# Altium PCB DT.PcbDoc
Units mil, origin at the board's own origin, x right, y up, seen from the top; angles counter-clockwise.
Board outline 3270 x 4330 mil, 2 copper layers (Top Layer, Bottom Layer); 105 components, 51 nets, 283 pads, 61 vias.
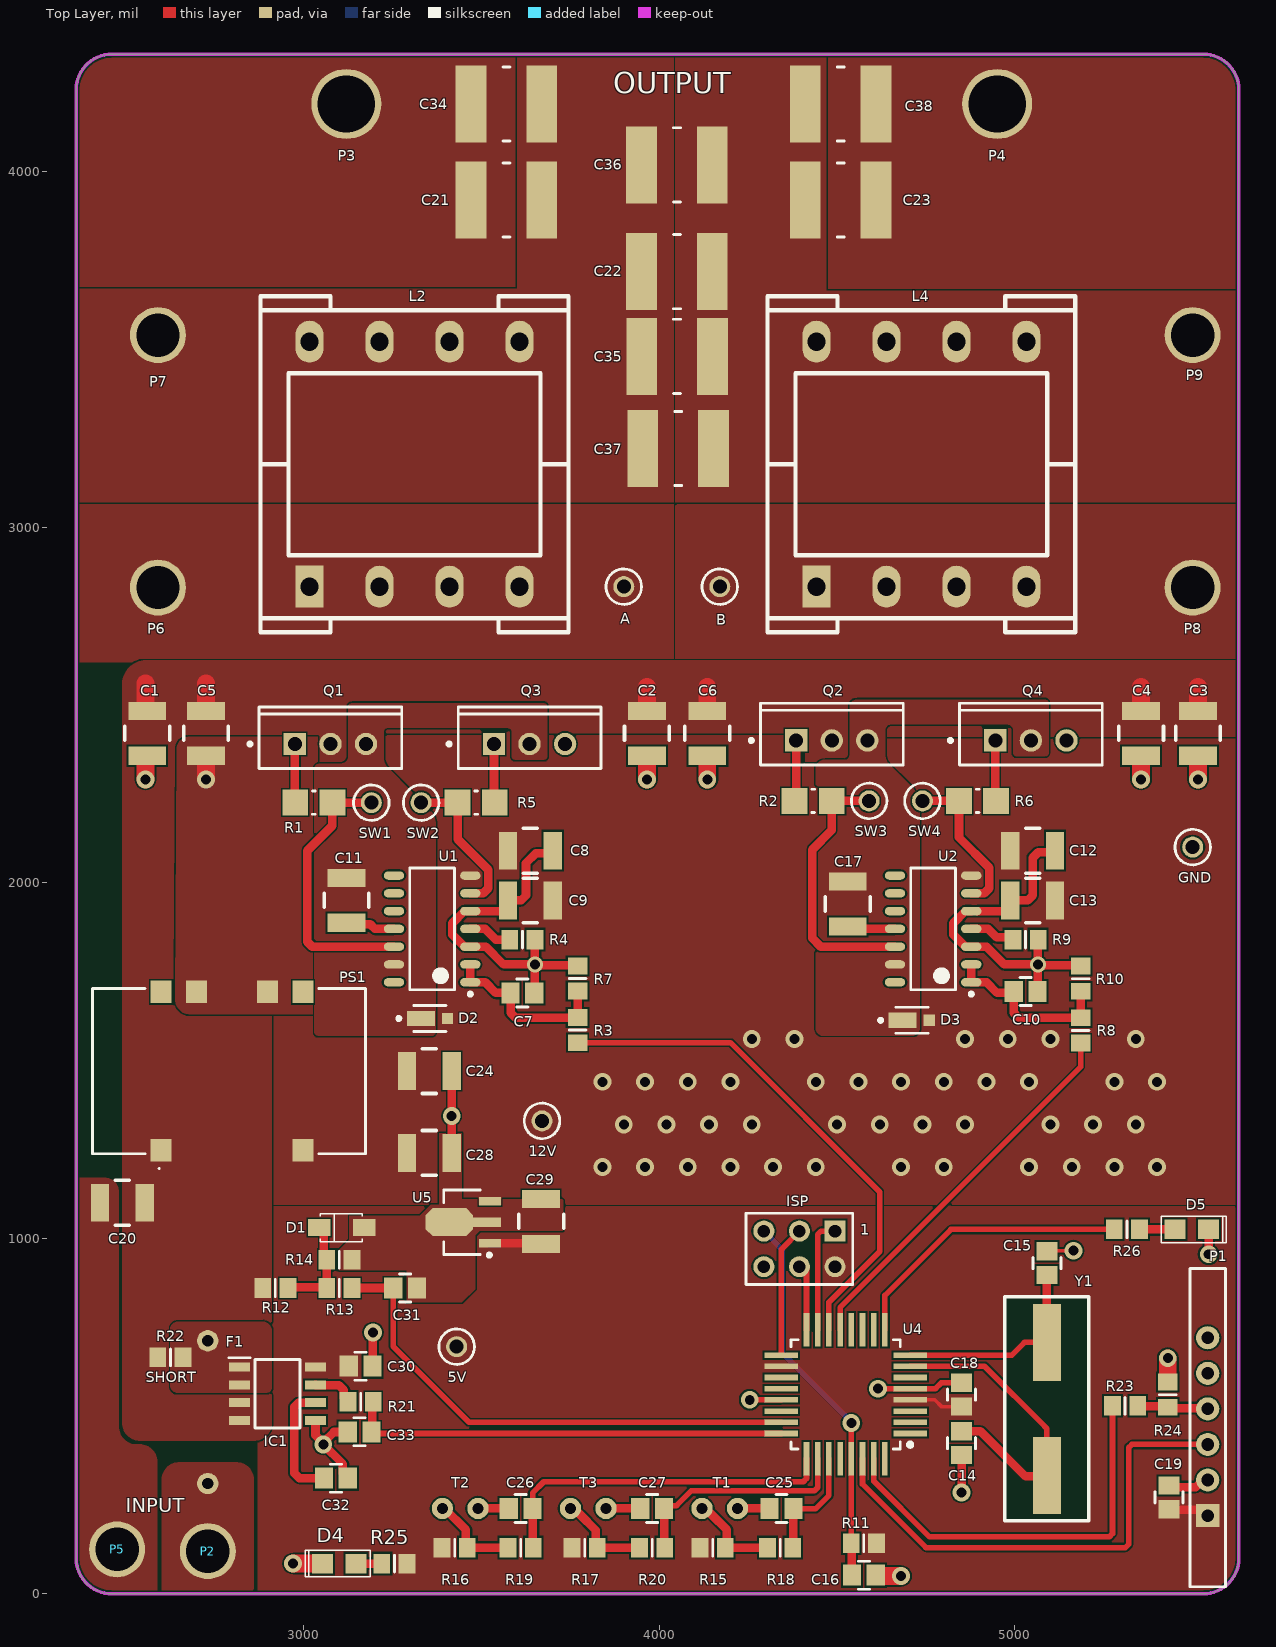
[diagram p0: Top Layer view]
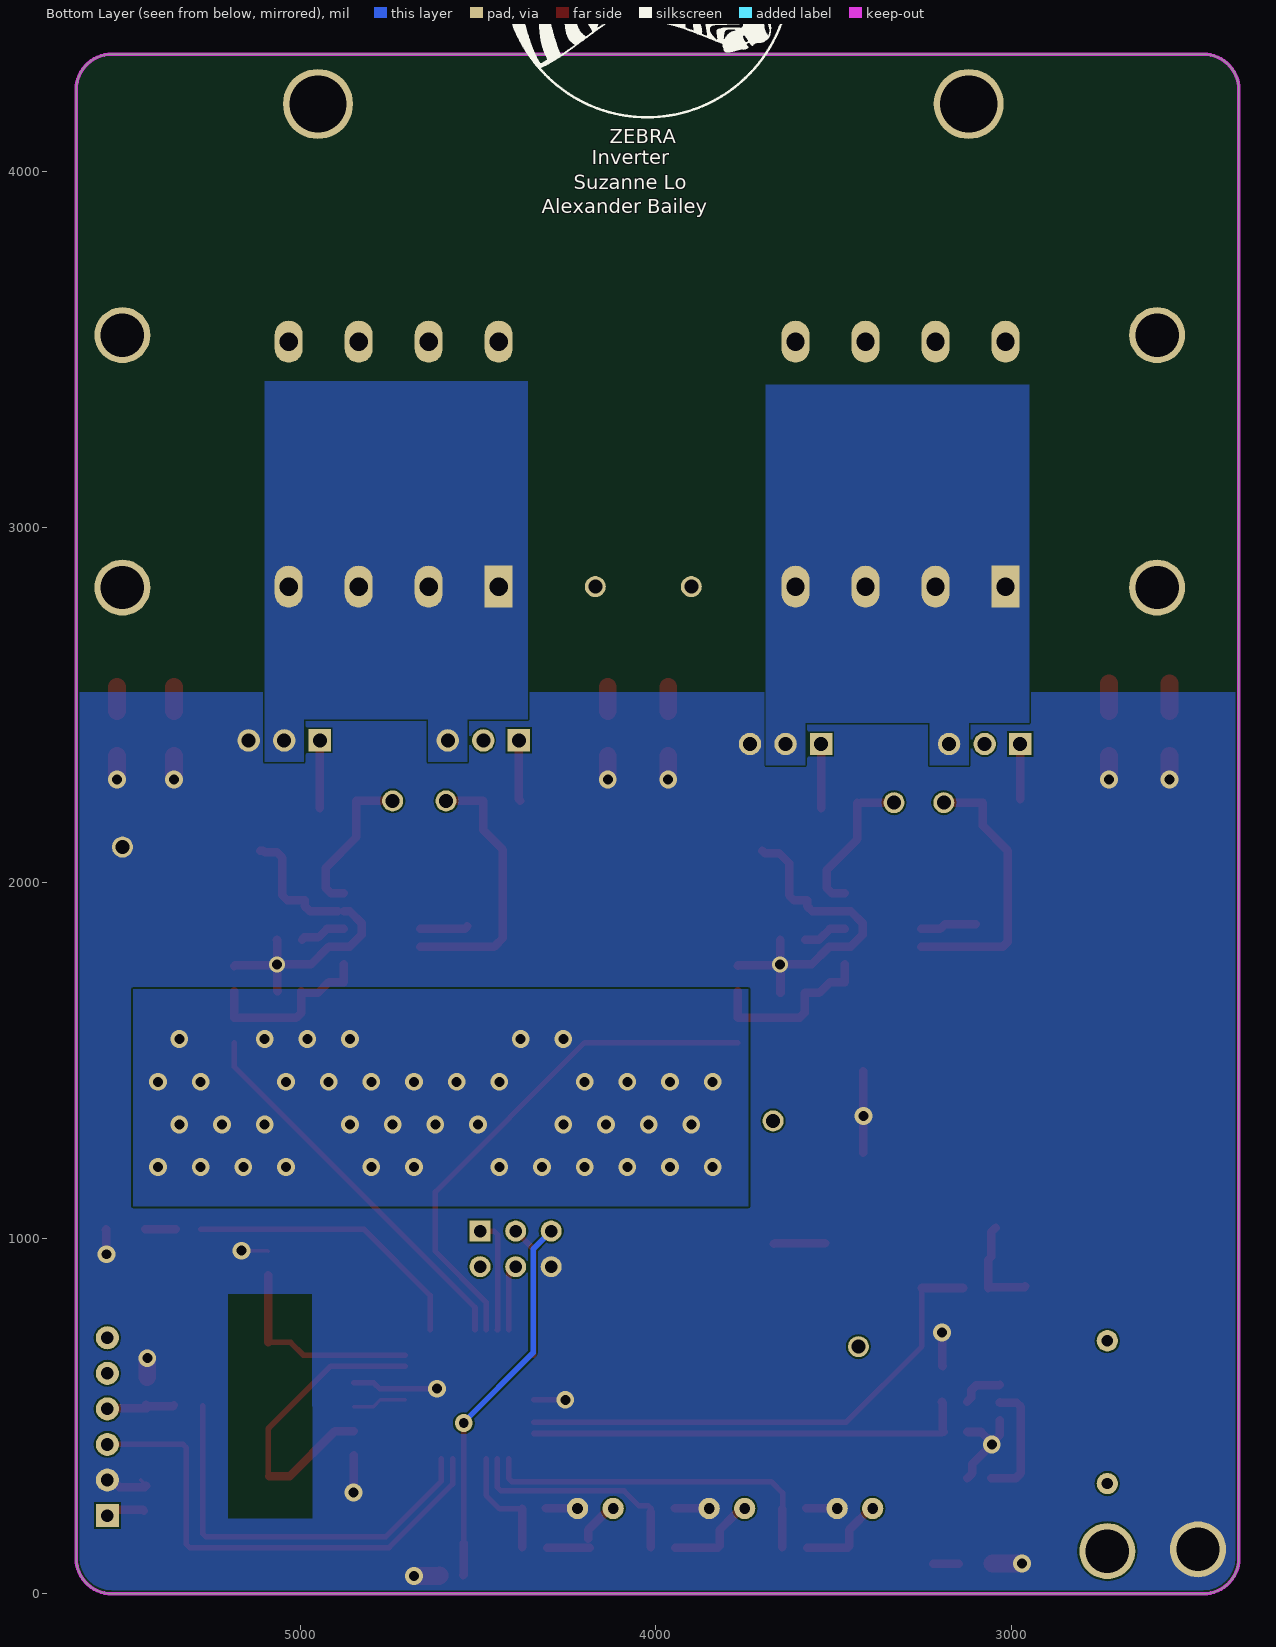
[diagram p1: Bottom Layer view, seen from below]
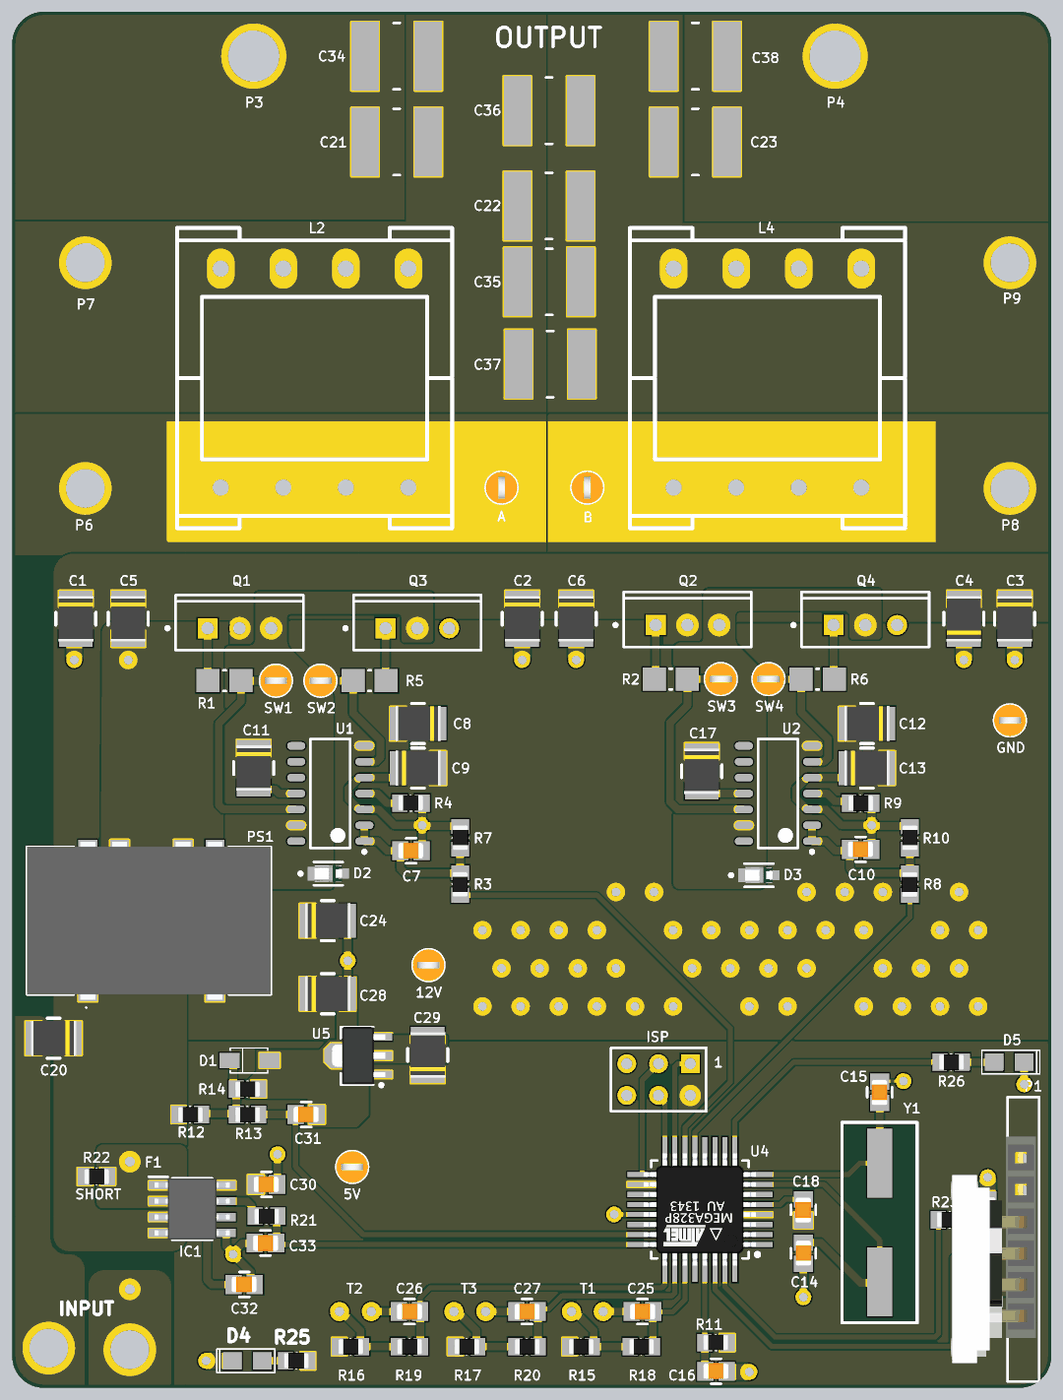
[diagram p2: 3D render of the assembled board from above, using the file's embedded part models]

## Layer stack, top to bottom
Top Solder: solder mask 0.4, Solder Resist, Dk 3.5
Top Layer: signal copper 1.4
Dielectric 1: dielectric 12.6, FR-4, Dk 4.8
Bottom Layer: signal copper 1.4
Bottom Solder: solder mask 0.4, Solder Resist, Dk 3.5

## Board outline
2360,100 ccw(c2460,100) 2460,0 5530,0 ccw(c5530,100) 5630,100 5630,4230 ccw(c5530,4230) 5530,4330 2460,4330 ccw(c2460,4230) 2360,4230

## Design rules (kind name [scope] priority, off if disabled: settings)
Clearance [All] p1: gap=5 ignorepadtopadclearanceinfootprint=FALSE
Height [All] p1: minheight=0 maxheight=5000 prefheight=500
HoleSize [All] p1: absolutevalues=TRUE maxlimit=165 minlimit=1 maxpercent=80.000 minpercent=20.000
MinimumSolderMaskSliver [All] p1: minsoldermaskwidth=5
PolygonConnect [All] p1: connectstyle=Direct reliefconductorwidth=10 reliefentries=4 polygonreliefangle="90 Angle" airgapwidth=0
RoutingVias [All] p1: holewidth=28 width=50 viastyle="Through Hole" minholewidth=28 minwidth=40 maxholewidth=28 maxwidth=50
SilkToSolderMaskClearance [All] p1: minsilkscreentomaskgap=1.5 clearancetoexposedcopper=TRUE
SolderMaskExpansion [All] p1: expansion=4 istentingtop=FALSE
Width "uC Route" [InComponent('U4')] p1: maxlimit=16 minlimit=16 preferedwidth=16 minimp=50.000000 maximp=50.000000 favimp=50.000000
Width [All] p2: maxlimit=50 minlimit=10 preferedwidth=24 minimp=50.000000 maximp=50.000000 favimp=50.000000
26 further rules are at their usual default settings.

## Classes and differential pairs
component class Misc: 5V 12V A B C20 C24 C25 C26 C27 C28 C29 C30 C31 C32 C33 D1 F1 IC1 P2 P3 P4 P5 PS1 R12 R13 R14 R15 R16 R17 R18 R19 R20 R21 R22 sw1 sw2 SW3 SW4 T1 T2 T3 U5
component class Control: C14 C15 C16 C18 C19 D4 D5 ISP P1 R11 R23 R24 R25 R26 U4 Y1
component class Bridge: C1 C2 C3 C4 C5 C6 C7 C8 C9 C10 C11 C12 C13 C17 C21 C22 C23 C34 C35 C36 C37 C38 D2 D3 L2 L4 P6 P7 P8 P9 Q1 Q2 Q3 Q4 R1 R2 R3 R4 R5 R6 R7 R8 R9 R10 U1 U2

## Components (designator, comment, footprint, x,y, rotation, side; value= is the part's Value field where it differs from the comment)
5V "5003" TP_TH 3430,695 r0 top (schematic designator TP5)
12V "5003" TP_TH 3670,1330 r0 top (schematic designator TP3)
A "5003" TP_TH 3900,2832.51 r90 top (schematic designator TP10)
B "5003" TP_TH 4170,2832.51 r90 top (schematic designator TP11)
C1 "" C1210 2560,2420 r270 top
C2 "" C1210 3965,2420 r270 top
C3 "" C1210 5515,2420 r270 top
C4 "" C1210 5355,2420 r90 top
C5 "" C1210 2725,2420 r270 top
C6 "" C1210 4135,2420 r270 top
C7 "" C0805 3615,1690 r0 top
C8 "" C1210 3637.01,2090 r180 top
C9 "" C1210 3637.01,1950 r0 top
C10 "" C0805 5030,1694.09 r0 top
C11 "10u" C1210 3120,1950 r270 top
C12 "" C1210 5050,2090 r180 top
C13 "" C1210 5050,1950 r0 top
C14 "" C0805 4850,423.46 r270 top
C15 "" C0805 5090,930 r90 top
C16 "" C0805 4575,52.18 r0 top
C17 "10u" C1210 4530,1940 r270 top
C18 "" C0805 4850,560 r90 top
C19 "" C0805 5433,271 r90 top
C20 "10u" C1210 2490,1100 r180 top
C21 "" C5750 3570,3920 r180 top
C22 "" C5750 4049.51,3718.59 r180 top
C23 "" C5750 4510,3920 r0 top
C24 "10u" C1210 3352.99,1470 r0 top
C25 "" C0805 4343.46,240 r180 top
C26 "" C0805 3610,240 r180 top
C27 "" C0805 3980,240 r180 top
C28 "10u" C1210 3352.99,1240 r0 top
C29 "10u" C1210 3667.6,1047.17 r90 top
C30 "" C0805 3160,640 r0 top
C31 "" C0805 3285,860 r0 top
C32 "" C0805 3090.2,325 r0 top
C33 "" C0805 3157.13,455.47 r180 top
C34 "" C5750 3570,4190 r180 top
C35 "" C5750 4050,3480 r180 top
C36 "" C5750 4049.51,4018.59 r180 top
C37 "" C5750 4053,3221 r180 top
C38 "" C5750 4510,4190 r0 top
D1 "BZT52H-B5V1" SOD123 3105,1030 r180 top
D2 "MSS1P6-M3/89A" FP-96591-MFG 3354.8,1618 r0 top value=40pF
D3 "MSS1P6-M3/89A" FP-96591-MFG 4710,1613 r0 top value=40pF
D4 "LTST-C170KGKT" "0805 LED" 3100,85 r180 top
D5 "LTST-C170KGKT" "0805 LED" 5497.76,1025 r0 top
F1 "MF-RX250/72-0" TH_FUSE 2730,310 r90 top
GND "5003" TP_TH 5500,2100 r0 top (schematic designator TP2)
IC1 "ACS730KLCTR-20AB-T" SOIC127P600X175-8N 2926.2,562.5 r0 top
ISP "P2" HDR2X3 4494.02,1020 r180 top
L2 "" EFD20 3311.57,3177 r90 top
L4 "" EFD20 4737,3177 r90 top
P1 "BLE Module Header" HM10_HDR1X6 5542.24,220 r90 top
P2 "Lug" "M3 Lug" 2730,120 r0 top
P3 "Lug" "M4 Lug" 3120,4190 r0 top
P4 "Lug" "M4 Lug" 4950,4190 r0 top
P5 "Lug" "M3 Lug" 2475,125 r0 top
P6 "Lug" "M3 Lug" 2590,2830 r0 top
P7 "Lug" "M3 Lug" 2590,3540 r0 top
P8 "Lug" "M3 Lug" 5500,2830 r0 top
P9 "Lug" "M3 Lug" 5500,3540 r0 top
PS1 "STH0548S12" STH0548S12 2790,1470 r0 top
Q1 "IPP80N04S4-04" INF-PG-TO220-3-1 3075,2390 r90 top
Q2 "IPP80N04S4-04" INF-PG-TO220-3-1 4485,2400 r90 top
Q3 "IPP80N04S4-04" INF-PG-TO220-3-1 3635,2390 r90 top
Q4 "IPP80N04S4-04" INF-PG-TO220-3-1 5045,2400 r90 top
R1 "" R1206 3028.17,2225 r180 top
R2 "" R1206 4432.83,2230 r180 top
R3 "" R0805 3770,1585.43 r90 top
R4 "" R0805 3615,1840 r0 top
R5 "" R1206 3485,2225 r180 top
R6 "" R1206 4895,2230 r180 top
R7 "" R0805 3770,1730.43 r270 top
R8 "" R0805 5185,1584.57 r90 top
R9 "" R0805 5030,1840 r180 top
R10 "" R0805 5185,1730 r270 top
R11 "" R0805 4575,142.18 r0 top
R12 "" R0805 2920,860 r180 top
R13 "" R0805 3100,860 r180 top
R14 "" R0805 3100,940 r180 top
R15 "" R0805 4150,130 r180 top
R16 "" R0805 3424.57,130 r180 top
R17 "" R0805 3790,130 r180 top
R18 "" R0805 4340,130 r180 top
R19 "" R0805 3610,130 r180 top
R20 "" R0805 3980,130 r180 top
R21 "" R0805 3160,540 r180 top
R22 "0R" R0805 2625,665 r180 top
R23 "" R0805 5310,528.5 r0 top
R24 "" R0805 5430,560 r270 top
R25 "" R0805 3255,85 r0 top
R26 "" R0805 5315,1025 r180 top
SW1 "5003" TP_TH 3190,2225 r0 top (schematic designator TP6)
SW2 "5003" TP_TH 3330,2225 r0 top (schematic designator TP7)
SW3 "5003" TP_TH 4590,2230 r0 top (schematic designator TP8)
SW4 "5003" TP_TH 4740,2230 r0 top (schematic designator TP9)
T1 "Thermistor" LeadedThermistor 4220,240 r90 top
T2 "Thermistor" LeadedThermistor 3490,240 r90 top
T3 "Thermistor" LeadedThermistor 3850,240 r90 top
U1 "IR21834STRPBF" SOIC127P600X175-14N 3361,1870 r180 top
U2 "IR21834STRPBF" SOIC127P600X175-14N 4770,1870 r180 top
U4 "ATmega328PB MCU" "32 - TQFP" 4524.25,561.1 r180 top
U5 "L78L05" SOT-89 3445,1045 r180 top
Y1 "SMT-XTAL 16MHz" HC49-US 5090,520 r90 top

## Footprints (in the part's own frame and the unit in brackets; to place one, negate y for a bottom-side part, rotate by r counter-clockwise, add the part's x,y. Pads: shape width x height; smd on the part's side, far side on the other; paste and mask are expansions set on the pad)
"32 - TQFP" [mm]
  rect 2.4x0.4 smd: 1(-4.6,2.8) 2(-4.6,2) 3(-4.6,1.2) 4(-4.6,0.4) 5(-4.6,-0.4) 6(-4.6,-1.2) 7(-4.6,-2) 8(-4.6,-2.8) 17(4.6,-2.8) 18(4.6,-2) 19(4.6,-1.2) 20(4.6,-0.4) 21(4.6,0.4) 22(4.6,1.2) 23(4.6,2) 24(4.6,2.8)
  rect 0.4x2.4 smd: 9(-2.8,-4.6) 10(-2,-4.6) 11(-1.2,-4.6) 12(-0.4,-4.6) 13(0.4,-4.6) 14(1.2,-4.6) 15(2,-4.6) 16(2.8,-4.6) 25(2.8,4.6) 26(2,4.6) 27(1.2,4.6) 28(0.4,4.6) 29(-0.4,4.6) 30(-1.2,4.6) 31(-2,4.6) 32(-2.8,4.6)
  silkscreen extent -4.74,-3.9 3.9,3.9, body extent -4.5,-4.5 4.5,4.5, height 1.3
"0805 LED" [mm] "RED AS AlGaAs SMD LED, Body; 2mm x 1.25 mm (LxW)"
  rect 1.5x1.4 smd: 1(-1.2,0) 2(1.2,0)
  silkscreen extent -2.2,-0.95 2.45,0.95, body extent -1,-0.63 1,0.63, height 1.1
C0805 [mm]
  rect 1.3x1.5 smd: 1(-0.85,0) 2(0.85,0)
  silkscreen extent -0.4,-1 0.4,1, body extent -1.03,-0.63 1,0.64, height 0.65
C1210 [mm]
  rect 1.3x2.7 smd: 1(-1.6,0) 2(1.6,0)
  silkscreen extent -0.5,-1.6 0.5,1.6, body extent -1.8,-1.4 1.8,1.4, height 1.24
C5750 [mm] "C5750 footprint"
  rect 2.2x5.5 smd: 1(-2.525,0) 2(2.525,0)
  silkscreen extent -0.25,-2.65 0.25,2.65, body extent -3.05,-2.7 3.05,2.7, height 3.2
EFD20 [mm]
  oval 3x2 hole 1.3: 1(-8.75,-7.5) 1(-8.75,-2.5) 1(-8.75,2.5) 2(8.75,-7.5) 2(8.75,-2.5) 2(8.75,2.5) 2(8.75,7.5)
  rect 3x2 hole 1.3: 1(-8.75,7.5)
  silkscreen extent -12,-11 12,11
FP-96591-MFG [mm]
  rect 2x1.1 smd paste+0 mask+0: 1(-0.65,0)
  rect 0.8x0.8 smd paste+0 mask+0: 2(1.25,0)
  silkscreen extent -2.35,-0.92 1.15,0.92, body extent -1.75,-0.8 1.75,0.8, height 0.25
HC49-US [mm] "20Mhz Crystal"
  rect 5.5x2 smd: 1(-4.75,0) 2(4.75,0)
  silkscreen extent -8,-3 8,3, body extent -4.79,-2.4 4.79,2.4, height 3.8
HDR2X3 [mm] "Connector; Header; 3x2 Position"
  rect 1.5x1.5 hole 0.9: 1(0,0)
  round 1.5 hole 0.9: 2(0,2.54) 3(2.54,0) 4(2.54,2.54) 5(5.08,0) 6(5.08,2.54)
  silkscreen extent -1.27,-1.27 6.35,3.81
HM10_HDR1X6 [mil] "Connector; Header; 6 Position"
  rect 65x65 hole 35.43: 1(0,0)
  round 65 hole 35.43: 2(100,0) 3(200,0) 4(300,0) 5(400,0) 6(500,0)
  silkscreen extent -200,-50 695,50, body extent -142,-39 571,228, height 1843
INF-PG-TO220-3-1 [mm] "FM, 3-Leads, Body 10x4.4mm, Pitch 2.54mm"
  rect 1.6x1.6 hole 1: 1(0,2.54)
  round 1.6 hole 1: 2(0,0) 3(0,-2.54)
  silkscreen extent -1.75,-5.1 2.65,5.87, body extent -1.75,-5.1 2.65,5.1, height 20.7
LeadedThermistor [mil]
  round 60 hole 30: 1(0,0) 2(0,100)
"M3 Lug" [mm]
  round 4 hole 3.1: 1(0,0)
"M4 Lug" [mm]
  round 5 hole 4.1: 1(0,0)
R0805 [mm]
  rect 1.2x1.4 smd: 1(-0.9,0) 2(0.9,0)
  silkscreen extent 0,-0.6 0,0.6, body extent -1.04,-0.63 0.99,0.64, height 0.6
R1206 [mm] "Chip Resistor, 2-Leads, Body 3.20x1.60mm, IPC Low Density"
  rect 1.85x1.85 smd: 1(-1.325,0) 2(1.325,0)
  silkscreen extent -0.1,-0.82 0.1,0.82, body extent -1.7,-0.87 1.7,0.87, height 0.65
SOD123 [mm] "SOD-123; 2 Leads; Body 2.7 x 1.6 mm, (LxW)"
  rect 1.6x1.2 smd: 1(-1.65,0) 2(1.55,0)
  silkscreen extent -1.5,-1 1.5,1, body extent -1.8,-0.86 1.8,0.86, height 1.21
SOIC127P600X175-8N [mm]
  rect 1.525x0.65 smd: 1(-2.712,1.905) 2(-2.712,0.635) 3(-2.712,-0.635) 4(-2.712,-1.905) 5(2.712,-1.905) 6(2.712,-0.635) 7(2.712,0.635) 8(2.712,1.905)
  silkscreen extent -3.47,-2.45 1.6,2.58, body extent -3,-2.45 3,2.45, height 1.75
SOIC127P600X175-14N [mm] "SOIC, 14-Leads, Body 8.65x3.90mm, Pitch 1.27mm, IPC Medium Density"
  oval 1.45x0.6 smd: 1(-2.725,3.81) 2(-2.725,2.54) 3(-2.725,1.27) 4(-2.725,0) 5(-2.725,-1.27) 6(-2.725,-2.54) 7(-2.725,-3.81) 8(2.725,-3.81) 9(2.725,-2.54) 10(2.725,-1.27) 11(2.725,0) 12(2.725,1.27) 13(2.725,2.54) 14(2.725,3.81)
  silkscreen extent -2.85,-4.35 1.6,4.78, body extent -2,-4.35 2,4.35, height 1.75
SOT-89 [mm] "SOT89, 3-Leads, Body 4.5x2.4 mm, Pitch 1.5mm, Lead Span 4.1mm, IPC Low Density"
  rect 1.6x0.6 smd: 1(-2,1.5) 3(-2,-1.5)
  rect 2x0.7 smd: 2(-1.8,0)
  oct 3.4x2 smd: 2(0.9,0)
  silkscreen extent -2.08,-2.3 1.3,2.47, body extent -2.25,-2.29 2,2.29, height 1.6
STH0548S12 [mm]
  rect 1.5x1.61 smd: 1(-4.88,-5.655) 5(5.28,-5.655) 6(5.28,5.655) 7(2.74,5.655) 9(-2.34,5.655) 10(-4.88,5.655)
  silkscreen extent -9.75,-7 9.75,5.9, body extent -9.75,-6.31 9.75,6.31, height 5.6
TH_FUSE [mil]
  round 60 hole 31.89: 1(0,0) 2(401.57,0)
TP_TH [mm] "Test Point, Through Hole, Dia 2.54mm"
  round 1.5 hole 1: 1(0,0)
  silkscreen extent -1.27,-1.27 1.27,1.27, body extent -1.27,-1.27 1.27,1.27, height 4.57

## Part data
5V 12V A B GND SW1 SW2 SW3 SW4: library part TestPoint, "Test Point, Orange, 1-Pin THD, RoHS", Forward Current="3 A", Forward Voltage="1.08 V", Max Operating Temperature="150 degC", Max Surge Current="80 A", Min Operating Temperature="-65 degC", Package Quantity=500, Peak Reverse Current="600 uA", ComponentLink1Description="Manufacturer URL", ComponentLink1URL=http://www.keyelco.com/, ComponentLink2Description=Datasheet, ComponentLink2URL=http://keyelco.com/userAssets/file/M65p56.pdf, DatasheetVersion=Jun-15, Diameter="5.3 mm", Height="0.25 inch", Length="9.5 mm", Mount="Through Hole", PackageDescription="1-Pin Through Hole Device, Dia 2.54 mm", PackageReference=5003, Packaging=Bulk, Pins=2, Radiation Hardening=No, REACH SVHC="No SVHC", RoHSCompliant=true, Weight="0.01 lb", Width="0.25 inch"
C1 C2 C3 C4 C5 C6 C7 C8 C9 C10 C11 C12 C13 C14 C15 C16 C17 C18 C19 C20 C21 C22 C23 C24 C25 C26 C27 C28 C29 C30 C31 C32 C33 C34 C35 C36 C37 C38: library part CerCap_SMT, "SMT ceramic capacitor selectable size"
D1: library part Zener_SMT_SOD123, "SMT zener diode with SOD123 package", Manufacturer="Nexperia USA Inc.", Manufacturer Part Number=BZT52H-B5V1,115, Operating Temperature="-65°C ~ 150°C (TA)", Package / Case=SOD-123F, Tolerance=±2%, Category="Discrete Semiconductor Products", ComponentLink1Description=https://assets.nexperia.com/documents/data-sheet/BZT52H_SER.pdf, ComponentLink1URL=https://assets.nexperia.com/documents/data-sheet/BZT52H_SER.pdf, Mounting Type="Surface Mount", Packaging="Cut Tape (CT)", Part Status=Active, Pricing 1="1=0.51, 10=0.408, 100=0.2164, 500=0.14232, 1000=0.09678 (NZD)", RoHS="RoHS Compliant", Stock 1=0, Supplier 1=Digi-Key, Supplier Device Package=SOD-123F
D2 D3: "DIODE SCHOTTKY 60V 1A MICROSMP", Capacitance=40pF, Forward Current=1A, Manufacturer=Vishay, Max Junction Temp=+150°C, Max Repetitive Reverse Voltage=60V, Max Surge Forward Current=25A, Package=96591, Peak Reverse Current=20uA, Temperature="-55°C to +150°C", Temperature Range Low=-55°C, Automotive=No, Category=Diode, ComponentLink2Description=Datasheet, ComponentLink2URL=http://www.vishay.com/docs/89018/mss1p6.pdf, Device Class L1="Discrete Semiconductors", Device Class L2=Diodes, Device Class L3="Schottky Diodes", Digikey Description="DIODE SCHOTTKY 60V 1A MICROSMP", Footprint Url=http://www.vishay.com/docs/96591/microsmp_do-219ad_fredpt.pdf, Height=0.73mm, Lead Free=Yes, Manufacturer Part Number=MSS1P6-M3/89A, Mouser Description="Schottky Diodes & Rectifiers 1.0 Amp 60 Volt", Octopart=https://octopart.com/mss1p6-m3%2F89a-vishay-42763284, RoHS=TRUE, Temperature Range High=+150°C
D4 D5: library part LED_SMT_0805, "SMT LED 0805 size", Color=Green, Current - Test=20mA, Lens Color=Colorless, Manufacturer="Lite-On Inc.", Millicandela Rating=35mcd, Package / Case="0805 (2012 Metric)", Supplier Part Number 1=160-1414-1-ND, Voltage - Forward (Vf) (Typ)=2V, Category=Optoelectronics, ComponentLink1Description=http://optoelectronics.liteon.com/upload/download/DS22-2000-073/LTST-C170KGKT.pdf, ComponentLink1URL=http://optoelectronics.liteon.com/upload/download/DS22-2000-073/LTST-C170KGKT.pdf, Features=-, Height (Max)=1.10mm, Lens Style/Size="Rectangle with Flat Top, 1.40mm x 1.25mm", Lens Transparency=Clear, Manufacturer Part Number=LTST-C170KGKT, Mounting Type="Surface Mount", Packaging="Cut Tape (CT)", Part Status=Active, Pricing 1="1=0.62, 10=0.459, 25=0.338, 100=0.2415, 250=0.16416, 500=0.14486, 1000=0.11347 (NZD)", RoHS="RoHS Compliant", Size / Dimension="2.00mm L x 1.25mm W", Stock 1=503069, Supplier 1=Digi-Key, Viewing Angle=130°, Wavelength - Dominant=571nm, Wavelength - Peak=574nm
F1: "PTC Resettable Fuse 2.5A(hold) 5A(trip) 72V 40A 2.5W 15.6s 0.05Ohm Radial 17.84 X 3.1 X 23.84mm Bulk", Case/Package=Radial, Current Rating=40A, Flammability Rating="UL94 V-0", Hold Current=2.5A, Manufacturer=Bourns, Max Operating Temperature=85°C, Max Power Dissipation=2.5W, Min Operating Temperature=-40°C, Operating Supply Voltage=72V, Package Quantity=500, Resistance=80mR, Trip Current=5A, Voltage Rating (AC)=60V, Approvals=UL, Body Diameter=21.3mm, Body Height=23.84mm, Body Length=17.84mm, Body Material=Polymer,Epoxy, Category="PTC Resettable Fuses", ComponentLink1Description=https://datasheet.ciiva.com/1274/1727898-1274752.pdf?src-supplier=Element14, ComponentLink1URL=https://datasheet.ciiva.com/1274/1727898-1274752.pdf?src-supplier=Element14, ComponentLink2Description=https://datasheet.ciiva.com/3019/mfrx72-3019851.pdf?src-supplier=Avnet, ComponentLink2URL=https://datasheet.ciiva.com/3019/mfrx72-3019851.pdf?src-supplier=Avnet, ComponentLink3Description=https://datasheet.ciiva.com/4501/mfrx72-4501292.pdf?src-supplier=Mouser, ComponentLink3URL=https://datasheet.ciiva.com/4501/mfrx72-4501292.pdf?src-supplier=Mouser, ComponentLink4Description=https://datasheet.ciiva.com/32425/mf-rx72-series-eng-tds-32425991.pdf?src-supplier=Distrelec, ComponentLink4URL=https://datasheet.ciiva.com/32425/mf-rx72-series-eng-tds-32425991.pdf?src-supplier=Distrelec, ComponentLink5Description=https://datasheet.ciiva.com/326/mfrx72-326639.pdf?src-supplier=Digi-Key, ComponentLink5URL=https://datasheet.ciiva.com/326/mfrx72-326639.pdf?src-supplier=Digi-Key, ComponentLink6Description=https://datasheet.ciiva.com/17401/mfrx72-17401583.pdf?src-supplier=Avnet+Europe, ComponentLink6URL=https://datasheet.ciiva.com/17401/mfrx72-17401583.pdf?src-supplier=Avnet+Europe, ComponentLink7Description=https://datasheet.ciiva.com/14539/70153449-14539563.pdf?src-supplier=Allied+Electronics, ComponentLink7URL=https://datasheet.ciiva.com/14539/70153449-14539563.pdf?src-supplier=Allied+Electronics, ComponentLink8Description=https://datasheet.ciiva.com/15187/getdatasheetpartid-298829-15187739.pdf?src-supplier=Verical, ComponentLink8URL=https://datasheet.ciiva.com/15187/getdatasheetpartid-298829-15187739.pdf?src-supplier=Verical, ComponentLink9Description=https://datasheet.ciiva.com/30097/669mfrx72-30097310.pdf?src-supplier=Onlinecomponents.com, ComponentLink9URL=https://datasheet.ciiva.com/30097/669mfrx72-30097310.pdf?src-supplier=Onlinecomponents.com, Contact Plating=Tin, Height=3.1mm, Lead Diameter=0.81mm, Lead Free="Lead Free", Lead Length=7.6mm, Lead Pitch=10.2mm, Length=31.44mm, Manufacturer Part Number=MF-RX250/72-0, Max Current Rating=40A, Mount="Through Hole,PCB", Number of Pins=2, Number of Terminals/Pins=2, Packaging=Bulk, Power Dissipation=2.5W, Pricing 1="1=0.60000, 5=0.58400, 10=0.56700, 50=0.47700, 100=0.39600, 250=0.36000, 500=0.30600, 1000=0.27000, 5000=0.24300 (USD)", Radiation Hardening=No, REACH SVHC="No SVHC", RoHS=Yes, RoHS Compliant=Yes, Series=MF-RX/72, Stock 1=206, Supplier 1=Digi-Key, Terminal Pitch=10.2mm, Termination=Radial, Thickness=3.1mm, Time to Trip=15.6s, Voltage Rating=72V, Voltage Rating (DC)=72V, Width=17.84mm, Wire/Cable Diameter=0.81mm
IC1: "Integrated Circuit", Manufacturer_Name="Allegro Microsystems", Arrow Part Number=ACS730KLCTR-20AB-T, Arrow Price/Stock=https://www.arrow.com/en/products/acs730klctr-20ab-t/allegro-microsystems?region=nac, Datasheet Link=https://www.allegromicro.com/-/media/files/datasheets/acs730-datasheet.ashx, Height=1.75mm, Manufacturer_Part_Number=ACS730KLCTR-20AB-T
ISP: library part "Header 3X2", "Header, 3-Pin, Dual row", LatestRevisionDate=17-Jul-2002, LatestRevisionNote="Re-released for DXP Platform.", Publisher="Altium Limited"
L2 L4: library part L
P1: library part BLEModule_TH, "2.54mm pitch 6-pin header for BLE module", LatestRevisionDate=17-Jul-2002, LatestRevisionNote="Re-released for DXP Platform.", Publisher="Altium Limited"
PS1: "Power Supply", Manufacturer_Name="XP POWER", Manufacturer_Part_Number=STH0548S15, Datasheet Link=https://4donline.ihs.com/images/VipMasterIC/IC/XPPO/XPPO-S-A0009456324/XPPO-S-A0009456324-1.pdf?hkey=EF798316E3902B6ED9A73243A3159BB0, Height=5.5mm
Q1 Q2 Q3 Q4: "OptiMOS-T2 Power-Transistor, 40 V VDS, 80 A ID, PG-TO220-3-1, Tube, Green", Manufacturer=Infineon, ComponentLink1Description="Manufacturer URL", ComponentLink1URL=http://www.infineon.com/, ComponentLink2Description=Datasheet, ComponentLink2URL=http://www.infineon.com/dgdl/IPP_B_I80N04S4-04_DS_1_0.pdf?folderId=db3a304412b407950112b42b75b74520&fileId=db3a304328c6bd5c01291c71d4085dfa&location=en.Products.Automotive_ICs.Automotive_MOSFETs.Single__N-Channel_40V_MOSFETs.DATASHEET.IPP_B_I80N04S4-04_DS_, ComponentLink3Description="Package Specification", ComponentLink3URL=http://www.infineon.com/dgdl/BTS117_DS_14.pdf?folderId=db3a30431400ef68011421b54e2e0564&fileId=db3a30433a747525013abff8302d549c&location=en.Products.Automotive_ICs.Smart_High-_and_Low-Side_Switches.HITFET___TEMPFET__-_Smart_Low-Side_Switches.DATASHEET.BTS1, DatasheetVersion="Rev. 1.0", Green=TRUE, Halogen-free=TRUE, ID (max)="80 A", IDpuls (max)="320 A", Mounting Technology="Through Hole", PackageDescription="3-Pin Plastic (Green) Transistor Single Outline Package, 10 x 9.25 mm Body, 2.54 mm Pitch", PackageReference=PG-TO220-3-1, PackageVersion=Jul-12, Packing=Tube, PartNumber=IPP80N04S4-04, Ptot (max)="71 W", QG="33 nC", RDS (on) (max) (@10V)="4.6 mOhm", RthJC (max)="2.1 K/W", Technology=OptiMOS-T2, VDS (max)="40 V", VGS(th) (max)="4 V", VGS(th) (min)="2 V"
R1 R2 R3 R4 R5 R6 R7 R8 R9 R10 R11 R12 R13 R14 R15 R16 R17 R18 R19 R20 R21 R22 R23 R24 R25 R26: library part Res_SMT, "0805 or 1206 resistor", ComponentLink1Description=https://nz.mouser.com/datasheet/2/315/AOA0000C304-1149620.pdf, LatestRevisionDate=17-Jul-2002, LatestRevisionNote="Re-released for DXP Platform.", PackageReference=AXIAL-0.4, Published=8-Jun-2000, Publisher="Altium Limited"
U1 U2: "600 V half-bridge gate driver IC with programmable deadtime, SOIC 14N, RoHS", Case/Package=SOIC, Manufacturer="International Rectifier", Max Operating Temperature=125°C, Max Output Current=2.3A, Max Power Dissipation=1W, Max Supply Current=1.6mA, Max Supply Voltage=20V, Min Operating Temperature=-40°C, Min Supply Voltage=10V, Nominal Supply Current=1mA, Output Current=1.9A, Package Quantity=1, Category="Gate Drivers", ComponentLink1Description=https://datasheet.ciiva.com/26878/ir21834strpbf-26878870.pdf?src-supplier=IIIC, ComponentLink1URL=https://datasheet.ciiva.com/26878/ir21834strpbf-26878870.pdf?src-supplier=IIIC, ComponentLink2Description=https://datasheet.ciiva.com/8068/ir2183-8068250.pdf?src-supplier=Element14, ComponentLink2URL=https://datasheet.ciiva.com/8068/ir2183-8068250.pdf?src-supplier=Element14, ComponentLink3Description=https://datasheet.ciiva.com/1950/ir2183-1950222.pdf?src-supplier=Digi-Key, ComponentLink3URL=https://datasheet.ciiva.com/1950/ir2183-1950222.pdf?src-supplier=Digi-Key, ComponentLink4Description=https://datasheet.ciiva.com/1950/ir2183-1950223.pdf?src-supplier=Digi-Key, ComponentLink4URL=https://datasheet.ciiva.com/1950/ir2183-1950223.pdf?src-supplier=Digi-Key, ComponentLink5Description=https://datasheet.ciiva.com/1950/ir2183-1950221.pdf?src-supplier=Digi-Key, ComponentLink5URL=https://datasheet.ciiva.com/1950/ir2183-1950221.pdf?src-supplier=Digi-Key, ComponentLink6Description=https://datasheet.ciiva.com/16287/ir2183-16287545.pdf?src-supplier=Future+Electronics, ComponentLink6URL=https://datasheet.ciiva.com/16287/ir2183-16287545.pdf?src-supplier=Future+Electronics, Fall Time=35ns, Height=1.5mm, Length=8.74mm, Manufacturer Part Number=IR21834STRPBF, Mount="Surface Mount", Number of Drivers=2, Number of Outputs=2, Number of Pins=14, Output Voltage=20V, Packaging="Tape and Reel", Power Dissipation=1W, Propagation Delay=330ns, REACH SVHC="No SVHC", Rise Time=60ns, RoHS=Yes, RoHS Compliant=Yes, Series=-, Supplier 1=Newark, Turn-Off Delay Time=35ns, Turn-On Delay Time=35ns, Width=3.99mm
U4: library part ATmega328PB_SMT_TQFP32, "IC MCU 8BIT 32KB FLASH 32TQFP", Manufacturer=Atmel, Manufacturer Part Number=ATMEGA328PB-AN, Operating Temperature="-40°C ~ 105°C (TA)", Package / Case=32-TQFP, Supplier Device Package="32-TQFP (7x7)", Voltage - Supply (Vcc/Vdd)="1.8 V ~ 5.5 V", Category="Integrated Circuits (ICs)", ComponentLink1Description=http://www.atmel.com/images/atmel-42397-8-bit-avr-microcontroller-atmega328pb_datasheet.pdf, ComponentLink1URL=http://www.atmel.com/images/atmel-42397-8-bit-avr-microcontroller-atmega328pb_datasheet.pdf, Connectivity="I²C, SPI, UART/USART", Core Processor=AVR, Core Size=8-Bit, Data Converters="A/D 8x10b", EEPROM Size="1K x 8", Number of I/O=27, Oscillator Type=Internal, Packaging=Tray, Part Status=Active, Peripherals="Brown-out Detect/Reset, POR, PWM, WDT", Pricing 1="1=2.74, 10=2.448, 25=2.2032, 100=2.0074, 250=1.81152, 500=1.62548, 1000=1.37088 (USD)", Program Memory Size="32KB (16K x 16)", Program Memory Type=FLASH, RAM Size="2K x 8", RoHS="RoHS Compliant", Speed=20MHz, Stock 1=366, Supplier 1=Digi-Key
U5: library part L78L05_SMT_SOT89, "LDO Voltage Regulator 5V", Supplier Part Number 1=497-1181-1-ND, ComponentLink1Description=http://www.st.com/content/ccc/resource/technical/document/datasheet/99/3b/7d/91/91/51/4b/be/CD00000544.pdf/files/CD00000544.pdf/jcr:content/translations/en.CD00000544.pdf, ComponentLink1URL=http://www.st.com/content/ccc/resource/technical/document/datasheet/99/3b/7d/91/91/51/4b/be/CD00000544.pdf/files/CD00000544.pdf/jcr:content/translations/en.CD00000544.pdf, Supplier 1=Digi-Key
Y1: library part TXC9C-16_XTAL_SMT, "9C-16.000MAAJ-T crystal 16.0000MHZ 18PF SMD", Frequency Stability=±30ppm, Load Capacitance=18pF, Manufacturer="TXC CORPORATION", Manufacturer Part Number=9C-16.000MAAJ-T, Operating Mode=Fundamental, Operating Temperature="-20°C ~ 70°C", Package / Case=HC-49/US, Ratings=-, Supplier Part Number 1=887-1059-1-ND, Category="Crystals, Oscillators, Resonators", ComponentLink1Description=http://www.txccorp.com/download/products/quartz_crystals/2015TXC_9C_32.pdf, ComponentLink1URL=http://www.txccorp.com/download/products/quartz_crystals/2015TXC_9C_32.pdf, Frequency Tolerance=±30ppm, Height - Seated (Max)="0.161\" (4.10mm)", Mounting Type="Surface Mount", Packaging="Cut Tape (CT)", Part Status=Active, Pricing 1="1=0.75, 10=0.628, 50=0.5656, 100=0.5026, 500=0.47744 (NZD)", RoHS="RoHS Compliant", Size / Dimension="0.449\" L x 0.189\" W (11.40mm x 4.80mm)", Stock 1=11514, Supplier 1=Digi-Key, Type="MHz Crystal"

## Via types
v1: diameter 50, hole 28, Top Layer to Bottom Layer, 59 vias
v2: diameter 45, hole 28, Top Layer to Bottom Layer, 2 vias

## Nets (pads, with @x,y where several pads share a name; then routed paths per layer and width w, separated by ;. In a path a pad name is that pad's centre, name@x,y a point inside that pad or via, vN(x,y) a via of type N, cw(c..) or ccw(c..) an arc to the next point about the centre after c; other vN are vias at no path point)
5V: 5V.1 C18.1 C19.1 C29.1 C30.1 IC1.8 ISP.2 P1.1 R11.2 R15.2 R16.2 R17.2 R25.2 U4.4 U4.18 U5.1 | length 405.5
  Top Layer w10: U4.4 4774.65,545.35 4793.46,526.54 C18.1
  Top Layer w24: U5.1 3523.93,985.76 3666.02,985.76 C29.1 ; C19.1@5439.73,233.27 5443,236.54 5523.46,236.54 P1.1@5540,220
12V: 12V.1 C8.2 C9.2 C12.2 C13.2 C24.1 C28.1 D2.2 D3.2 PS1.5 U1.7 U2.7 U5.3
  other v1: 3840,1200 3960,1200 4080,1200 4200,1200 4320,1200 4440,1200 4680,1200 4800,1200 5040,1200 5160,1200 5280,1200 5400,1200 3900,1320 4020,1320 4140,1320 4260,1320 4500,1320 4620,1320 4740,1320 4860,1320 5100,1320 5220,1320 5340,1320 3840,1440 3960,1440 4080,1440 4200,1440 4440,1440 4560,1440 4680,1440 4800,1440 4920,1440 5040,1440 5280,1440 5400,1440 4260,1560 4380,1560 4860,1560 4980,1560 5100,1560 5340,1560
30V: C1.1 C2.1 C3.1 C4.2 C5.1 C6.1 C20.1 IC1.3 IC1.4 PS1.1 Q1.2 Q2.2 R12.2 R22.2 | length 422
  Top Layer w50: C1.1@2555,2482.99 2555,2560 ; C5.1 2725,2560 ; C2.1 3965,2550 ; C6.1 4135,2550 ; C4.2 5355,2550 ; C3.1 5515,2550
A: A.1 C11.1 D2.1 L2.1 P6.1 Q1.3 Q3.2 U1.13 | length 25.2
  Bottom Layer w50: L2.1@3213.15,2824.81 L2.1@3213.15,2850
B: B.1 C17.1 D3.1 L4.1 P8.1 Q2.3 Q4.2 U2.13
DEBUG: R26.2 U4.9 | length 819.2
  Top Layer w15.7: U4.9 4634.49,839.49 4820,1025 R26.2
GND: C1.2 C2.2 C3.2 C4.1 C5.2 C6.2 C7.2 C8.1 C9.1 C10.2 C12.1 C13.1 C14.2 C15.2 C16.2 C18.2 C19.2 C20.2 C24.2 C25.2 C26.2 C27.2 C28.2 C29.2 C30.2 C31.2 C32.2 C33.2 D1.1 D4.2 D5.2 GND.1 IC1.5 ISP.6 P1.2 P5.1 PS1.7 PS1.9 Q3.3 Q4.3 R4.2 R7.1 R9.1 R10.1 R14.1 R24.1 T1.1 T2.1 T3.1 U1.3 U1.5 U2.3 U2.5 U4.5 U4.21 U5.2 | length 4210.6
  Top Layer w10: v1(4254.36,545.65) v1@4254.65,545.35 ; C15.2 5091.54,965 v1(5165,965) ; C19.2 C19.2@5448.54,320
  Top Layer w15.7: v1@4254.65,545.35 U4.21 ; v1(4614.93,576.85) U4.5 4776.79,576.85 4793.41,593.46 C18.2
  Top Layer w24: IC1.5 3032.97,446.07 v1@3048.5,430.54 ; C32.2 3110.07,338.59 3110.07,364.93 v1(3055,420) 3055,425 3085,455 3123.19,455 C33.2 ; C30.2 3194.23,640.77 3194.23,734.23 v1(3195,735) ; C28.2 v1(3415.98,1344.02) C24.2 ; T2.1 C26.2 ; C7.2 3649.23,1690.77 3649.23,1769.23 v2(3650,1770) ; R4.2 3650.22,1839.78 3650.22,1770.22 v2(3650,1770) ; C8.1 3692.47,2082.47 3652.47,2082.47 3625,2055 3625,1964.06 3610.94,1950 C9.1 3574.02,1933.59 3560.43,1920 U1.5 3451.93,1920 3417.74,1885.81 3417.74,1854.19 3451.93,1820 U1.3 3468.47,1819.81 3512.11,1819.81 3561.92,1770 v2(3650,1770) ; R7.1 3767.93,1767.93 3652.07,1767.93 v2(3650,1770) ; T3.1 C27.2 ; T1.1 C25.2 ; v1(4850,285) C14.2 ; U2.5 4860.93,1920 4826.74,1885.81 4826.74,1854.19 4860.93,1820 U2.3 4877.47,1819.81 4920.19,1819.81 4970,1770 v2@5064.45,1770 ; U2.5@4893.83,1920 4973.42,1920 4987.01,1933.59 C13.1 5035.94,1950 5050,1964.06 5050,2070 5065.46,2085.46 5099.4,2085.46 5103.94,2090 C12.1 ; C10.2 5064.45,1695.08 v2@5064.45,1770 ; R9.1 5064.45,1839.02 v2@5064.45,1770 ; R10.1 5182.72,1767.72 5067.28,1767.72 v2(5065,1770) v2@5064.45,1770 ; C19.2 5437.46,300 5508.91,300 5528.91,320 P1.2@5540,320 ; v1(5545,955) D5.2 D5.2@5547.5,1022.5 ; v1@5547.5,957.5 v1@5550,955
  Top Layer w50: v1(2555,2290) C1.2@2555,2357.01 ; v1(2725,2290) C5.2 ; v1(2970,85) D4.2 ; v1(3965,2290) C2.2 ; v1(4135,2290) C6.2 ; C16.2 4608.46,50.59 4609.06,50 v1(4680,50) ; v1(5355,2290) C4.1 ; R24.1@5430,610 v1(5430,662.56) ; v1(5515,2290) C3.2
IP+: F1.2 IC1.1 IC1.2 R22.1
Isens: C33.1 R21.1 U4.24 | length 1241
  Top Layer w16: C33.1 3195.2,450.87 U4.24
  Top Layer w24: C33.1 3193.01,457.89 3193.01,537.58 R21.1
Lpt_A: C21.2 C34.2 P3.1
Lpt_B: C23.2 C38.2 P4.1
MISO: ISP.4 U4.16 | length 177.8
  Top Layer w15.7: U4.16 ISP.4@4414.02,920
MOSI: ISP.1 U4.15 | length 321.2
  Top Layer w15.7: U4.15 4445,742.72 4445,1010 4455,1020 ISP.1
NetC7_1: C7.1 R3.2 R7.2 U1.1 U1.2 | length 500.4
  Top Layer w24: U1.2 U1.1 3468.47,1719.81 3510.19,1719.81 3540,1690 C7.1 3581.54,1634.06 3595.59,1620 3769.13,1620 R3.2 R7.2
NetC10_1: C10.1 R8.2 R10.2 U2.1 U2.2 | length 512.3
  Top Layer w24: U2.2 U2.1 4877.47,1719.81 4920.19,1719.81 4950,1690 4992.44,1690 C10.1 4996.54,1634.06 5010.59,1620 R8.2 R10.2
NetC11_2: C11.2 U1.11 | length 158.1
  Top Layer w24: C11.2@3100,1882.99 3187.01,1882.99 3200,1870 U1.11@3252.72,1870
NetC17_2: C17.2 U2.11 | length 135.6
  Top Layer w24: C17.2 4537.01,1870 U2.11
NetC21_1: C21.1 C22.2 C34.1 C35.2 C36.2 C37.2 L2.2 P7.1
NetC22_1: C22.1 C23.1 C35.1 C36.1 C37.1 C38.1 L4.2 P9.1
NetC32_1: C32.1 IC1.6 | length 340.9
  Top Layer w24: IC1.6@3032.18,538.29 IC1.6 3032.18,536.7 2984.46,536.7 2973.7,525.94 2973.7,339.06 2987.76,325 C32.1
NetD1_2: D1.2 R12.1 R13.2 R14.2 | length 285
  Top Layer w24: R12.1@2960.43,865 2962.93,862.5 3062.07,862.5 R13.2 R14.2 3055.98,948.58 3055.98,1018.38 3044.36,1030 D1.2
NetD4_1: D4.1 R25.1 | length 72.3
  Top Layer w24: D4.1 R25.1
NetD5_1: D5.1 R26.1 | length 85.1
  Top Layer w24: R26.1 D5.1@5435.51,1025
NetIC1_7: IC1.7 R21.2 | length 123.6
  Top Layer w24: IC1.7 3033.77,586.7 3098.89,586.7 3112.94,572.64 3112.94,551.62 R21.2
NetP1_4: P1.4 R23.2 R24.2 | length 196.8
  Top Layer w24: R23.2@5355.43,530 5358.15,527.28 5429.72,527.28 R24.2@5430,527.57 ; R24.2@5434.28,531.28 5434,531.57 R24.2@5430,527.57 ; P1.4@5540,520 5537.72,522.28 5432.28,522.28 R24.2 R24.2@5430,527.57
NetQ1_1: Q1.1 R1.2 | length 155.7
  Top Layer w24: R1.2@2975,2234.33 Q1.1
NetQ2_1: Q2.1 R2.2 | length 171.8
  Top Layer w24: R2.2 4385,2234.33 Q2.1
NetQ3_1: Q3.1 R5.1 | length 180
  Top Layer w24: R5.1@3535,2210 Q3.1
NetQ4_1: Q4.1 R6.1 | length 180
  Top Layer w24: R6.1@4945,2210 Q4.1@4945,2390
NetR4_1: R4.1 U1.4 | length 123.7
  Top Layer w24: U1.4 3468.47,1869.81 3510.19,1869.81 3540,1840 R4.1
NetR9_2: R9.2 U2.4 | length 129.7
  Top Layer w24: U2.4 4925,1870 4949,1846 4988.57,1846 R9.2
NetR15_1: R15.1 R18.2 T1.2 | length 239.6
  Top Layer w24: T1.2 4129.74,240 4147.41,222.33 4147.67,222.33 4190,180 R15.1@4190,154.37 ; R15.1 R18.2
NetR16_1: R16.1 R19.2 T2.2 | length 257
  Top Layer w24: T2.2 3395.94,240 3455.94,180 3455.94,134.05 R16.1 R19.2
NetR17_1: R17.1 R20.2 T3.2 | length 266.2
  Top Layer w24: T3.2 3759.74,240 3777.41,222.33 3777.67,222.33 3820.67,179.33 3820.67,134.76 R17.1 R20.2
PWM_A: R3.1 U4.14 | length 1471
  Top Layer w15.7: R3.1 4200,1550 4620,1130 4620,963.01 4477.01,820.02 U4.14
PWM_B: R8.1 U4.13 | length 1087.1
  Top Layer w15.7: U4.13 4508.5,805.22 5185,1481.72 R8.1
RST: C16.1 ISP.5 R11.1 U4.29 | length 1073.4
  Top Layer w10: R11.1 R11.1@4540,142.61
  Top Layer w15.7: R11.1@4540,142.61 U4.29 v1(4540,480)
  Top Layer w24: R11.1 4540.55,141.19 4540.55,53.16 C16.1
  Bottom Layer w15.7: ISP.5 4345,969.02 4345,678 v1@4544,479
Rx: P1.3 U4.30 | length 1393.2
  Top Layer w15.7: U4.30 4571.5,308.5 4750,130 5310.8,130 5320,139.2 5320,410.8 5329.2,420 P1.3@5540,420
SCK: ISP.3 U4.17 | length 369.7
  Top Layer w15.7: U4.17 4343.15,969.13 ISP.3
sw1: R1.1 SW1.1 U1.12 | length 785.9
  Top Layer w24: SW1.1@3185.33,2225.33 SW1.1@3190,2230 ; SW1.1 R1.1 3080,2224.67 3080,2160 3010,2090 3010,1834.06 3024.06,1820 U1.12
sw2: R5.2 SW2.1 U1.6 | length 439.9
  Top Layer w24: SW2.1 3422.83,2225 3427.83,2220 R5.2 3432.83,2122.17 3518.83,2036.17 3518.83,1984.06 3504.77,1970 U1.6
sw3: R2.1 SW3.1 U2.12 | length 756.4
  Top Layer w24: SW3.1 R2.1 4485,2147.79 4430,2092.79 4430,1844.06 4454.06,1820 U2.12
sw4: R6.2 SW4.1 U2.6 | length 440.3
  Top Layer w24: SW4.1 R6.2 4842.83,2127.17 4927.83,2042.17 4927.83,1984.06 4913.77,1970 U2.6
TSens1: C25.1 R18.1 U4.27 | length 327.7
  Top Layer w15.7: C25.1 4377.92,239 4439,239 4477.01,277.01 U4.27
  Top Layer w24: R18.1@4376.18,130.74 C25.1@4376.18,239.25
TSens2: C26.1 R19.1 U4.25 | length 994.7
  Top Layer w15.7: C26.1 3643.46,283.46 3675,315 4404.79,315 4413.99,324.2 U4.25
  Top Layer w24: R19.1@3644.45,130.98 C26.1@3644.45,239.01
TSens3: C27.1 R20.1 U4.26 | length 636.4
  Top Layer w15.7: C27.1 4021.67,248.2 4048.2,248.2 4089.3,289.3 4435.61,289.3 4445.51,299.2 U4.26
  Top Layer w24: R20.1@4014.45,130.98 C27.1@4014.45,230
Tx: R23.1 U4.31 | length 1162.7
  Top Layer w15.7: U4.31 4602.99,317.01 4760,160 5265.37,160 5274.57,169.2 R23.1
Vin: F1.1 P2.1
Vsens: C31.1 R13.1 U4.23 | length 1460.5
  Top Layer w16: C31.1 3251.54,695.56 3464.74,482.36 U4.23
  Top Layer w24: R13.1 C31.1
X1: C14.1 U4.7 Y1.1 | length 882.4
  Top Layer w15.7: U4.7 4914.3,639.84 5084.14,470 5090,464.14 Y1.1 Y1.1@5087.01,330
  Top Layer w24: C14.1 4903.07,456.93 5030,330 Y1.1@5087.01,330
X2: C15.1 U4.8 Y1.2 | length 588.9
  Top Layer w15.7: U4.8 4991.34,671.34 5027.01,707.01 Y1.2
  Top Layer w24: Y1.2 C15.1
pads on no net: P1.5 P1.6 PS1.6 PS1.10 U1.8 U1.9 U1.10 U1.14 U2.8 U2.9 U2.10 U2.14 U4.1 U4.2 U4.3 U4.6 U4.10 U4.11 U4.12 U4.19 U4.20 U4.22 U4.28 U4.32

## Polygon pours and split planes (outlines as drawn)
NetC21_1 on Top Layer "NETC21_1_L01_P032" (solid, pour order 32): 2360,3670 3600,3670 3600,4330 4040,4330 4040,3070 2360,3070
NetC22_1 on Top Layer "NETC22_1_L01_P033" (solid, pour order 33): 4040,3070 5630,3070 5630,3665 4470,3665 4470,4330 4040,4330
Lpt_A on Top Layer "LPT_A_L01_P036" (solid, pour order 36): 3600,4330 2360,4330 2360,3670 3600,3670
Lpt_B on Top Layer "LPT_B_L01_P038" (solid, pour order 38): 5630,4330 4470,4330 4470,3670 5630,3670
A on Top Layer "A_L01_P042" (solid, pour order 42): 4040,3070 2360,3070 2360,2620 4040,2620
B on Top Layer "B_L01_P043" (solid, pour order 43): 4040,3070 5630,3070 5630,2620 5590,2620 4040,2620
5V on Top Layer "5V_L01_P041" (solid, remove dead copper, pour order 41): 2870,1133.06 2870,0 5630,0 5630,1145.42
GND on Top Layer "GND_L01_P039" (solid, pour order 39): 2362.2,0 2587.52,0 2587.52,372.48 ccw(c2540,372.48) 2540,420 2530,420 cw(c2530,470) 2480,470 2480,1130 ccw(c2440,1130) 2440,1170 2362.2,1170
GND on Top Layer "GND_L01_P029" (solid, pour order 29): 2679.95,1630 3040,1630 3040,2410 2676.87,2410 ccw(c2676.87,2375.46) 2642.33,2375.64 2638.65,1671.52 ccw(c2679.95,1671.3)
30V on Top Layer "30V_L01_P030" (solid, pour order 30): 2910,2410 3014.8,2410 3014.8,2330 3130,2330 3130,2420 4410,2420 4410,2340 4550,2340 4550,2410 5629.98,2410 5629.99,2625 2555,2625 ccw(c2554.99,2560.01) 2490,2560 2490,480 ccw(c2540,480) 2540,430 2860,430 ccw(c2860,480) 2910,480
IP+ on Top Layer "IP+_L01_P022" (solid, remove dead copper, pour order 22): 2625,745 2625,585 ccw(c2645,585) 2645,565 2895,565 ccw(c2895,580) 2910,580 2910,740 ccw(c2885,740) 2885,765 2645,765 ccw(c2645,745)
12V on Top Layer "12V_L01_P031" (solid, remove dead copper, pour order 31): 5621.79,2433.79 5621.79,1094.79 2641.79,1094.79 2641.79,2433.79
B on Top Layer "B_L01_P019" (solid, pour order 19): 4645.82,2334.18 4705.71,2274.29 cw(c4639.84,2208.41) 4733,2208.41 4733,1593 cw(c4710,1593) 4710,1570 4460,1570 cw(c4460,1590) 4440,1590 4440,2320 cw(c4465,2320) 4465,2345 4519.59,2345 ccw(c4519.59,2360.41) 4535,2360.41 4535,2405 4535,2495 cw(c4555,2495) 4555,2515 5085,2515 cw(c5085,2505) 5095,2505 5095,2365 cw(c5085,2365) 5085,2355 5005,2355 cw(c5005,2365) 4995,2365 4995,2428.38 ccw(c4978.38,2428.38) 4978.38,2445 4651.62,2445 ccw(c4651.62,2428.38) 4635,2428.38 4635,2360.31 ccw(c4671.95,2360.31)
A on Top Layer "A_L01_P020" (solid, pour order 20): 3235.82,2324.18 3352.93,2207.07 cw(c3309.31,2163.45) 3371,2163.44 3371,1581 cw(c3359,1581) 3359,1569 3041,1569 cw(c3041,1580) 3030,1580 3030,2320 cw(c3045,2320) 3045,2335 3104.8,2335 ccw(c3104.8,2355.19) 3125,2355.2 3125,2395 3125,2495 cw(c3135,2495) 3135,2505 3675,2505 cw(c3675,2495) 3685,2495 3685,2355 cw(c3675,2355) 3675,2345 3595,2345 cw(c3595,2355) 3585,2355 3585,2422.62 ccw(c3572.62,2422.62) 3572.62,2435 3235.82,2435 ccw(c3235.82,2424.18) 3225,2424.18 3225,2350.31 ccw(c3261.95,2350.31)
Vin on Top Layer "VIN_L01_P026" (solid, pour order 26): 2650,370 2810,370 cw(c2810,320) 2860,320 2860,0 2600,0 2600,320 cw(c2650,320)
GND on Top Layer "GND_L01_P028" (solid, pour order 28): 3290,910 3290,820 3445,820 3482,857 3482,1008 3495.22,1021.22 3728.78,1021.22 3730.18,1110 3445,1110 3445,1295 3380,1295 3380.68,1294.32 3380.68,1094.37 3357.32,1094.37 3326.57,1063.62 3128.46,1063.62 3128.46,996.38 3100,967.91 3100,910
GND on Bottom Layer "GND_L02_P040" (solid, pour order 40): 2362.2,2535 2362.2,0 5630,0 5630,2535
12V on Bottom Layer "12V_L02_P023" (solid, pour order 23): 3740,1700 5470,1700 5470,1090 3740,1090
B on Bottom Layer "B_L02_P025" (solid, pour order 25): 4360,3410 5100,3410 5100,2340 4990,2340 4990,2460 4640,2460 4640,2340 4530,2340 4530,2460 4380,2460 4360,2460
A on Bottom Layer "A_L02_P024" (solid, pour order 24): 2950,3400 3690,3400 3690,2330 3580,2330 3580,2450 3230,2450 3230,2330 3120,2330 3120,2450 2970,2450 2950,2450
no net on Top Solder "THERMAL PLANE" (solid, pour order 27): 2846,2666 2851,2661 5266,2661 5266,3036 5266,3041 2846,3041

## Keep-outs
Keep-Out Layer:
  the board outline again, w10

## Other copper
Top Layer:
  pour cut-out: 4972,839 5208,839 5208,211 5209,210 4971,210
Bottom Layer:
  pour cut-out: 4968,843 5204,843 5203,842 5203,213 4966,213

## Silkscreen, mask and mechanical layers (free items; w line width, h text height)
Top Overlay:
  text "OUTPUT" at 3870,4220 h60
  text "SHORT" at 2555,595 h30
  text "INPUT" at 2500,230 h40
Bottom Overlay:
  region: 2099 vertices and 47 holes, not listed, extent 3620.52,4149.94 4428.67,4957.92
  text "ZEBRA" at 4130,4080 h40
  text "Inverter" at 4180,4020 h40
  text "Suzanne Lo" at 4230,3950 h40
  text "Alexander Bailey" at 4320,3883.33 h40

## Text inside footprints (layer, text, board x,y; h text height)
ISP: Top Overlay "1" at 4565,1010 h30